# Altium PCB PCB1.PcbDoc
Units mil, origin at the board's own origin, x right, y up, seen from the top; angles counter-clockwise.
Board outline 5850 x 4725 mil, 2 copper layers (Top Layer, Bottom Layer); 96 components, 60 nets, 305 pads, 0 vias.
Unrouted connection lines stored in the file: 105.
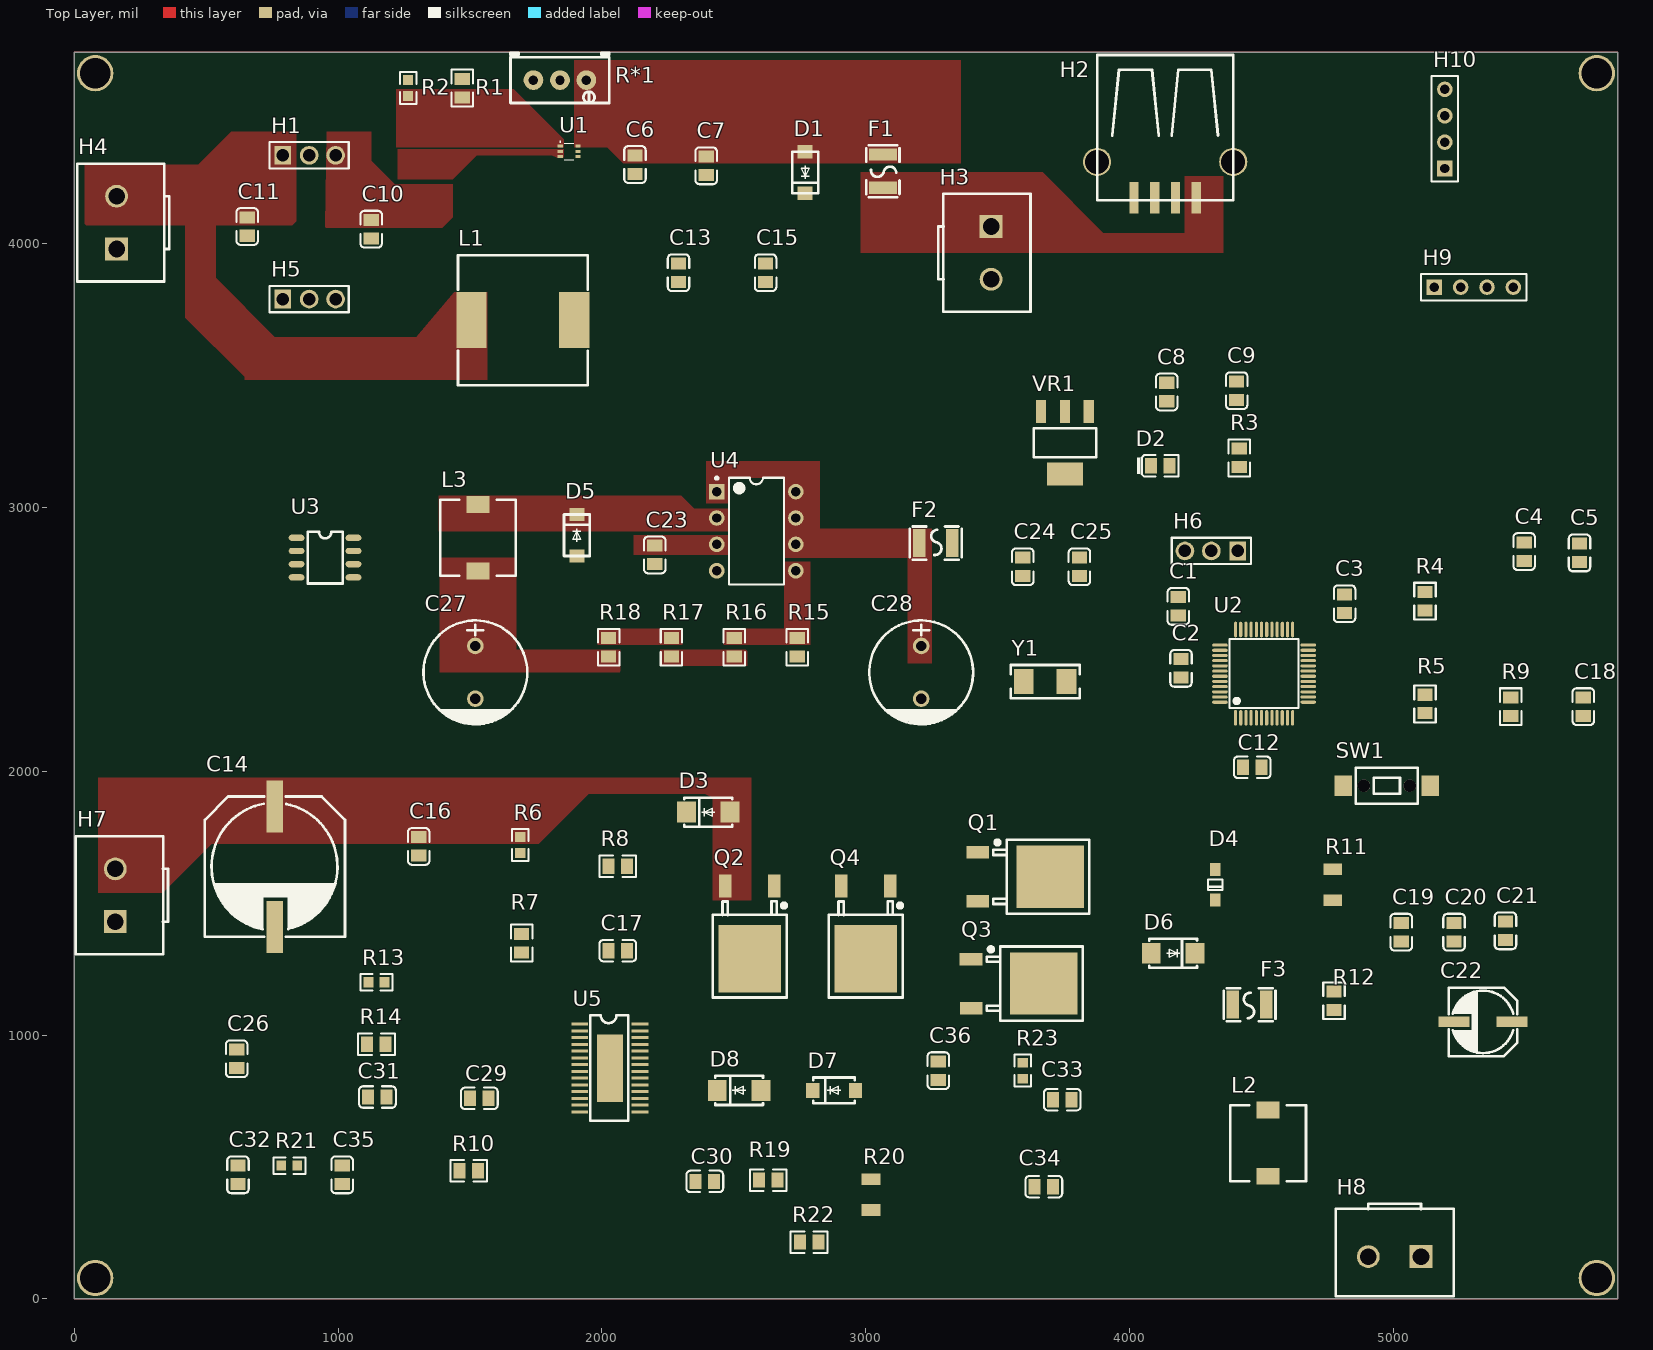
[diagram p0: Top Layer view]
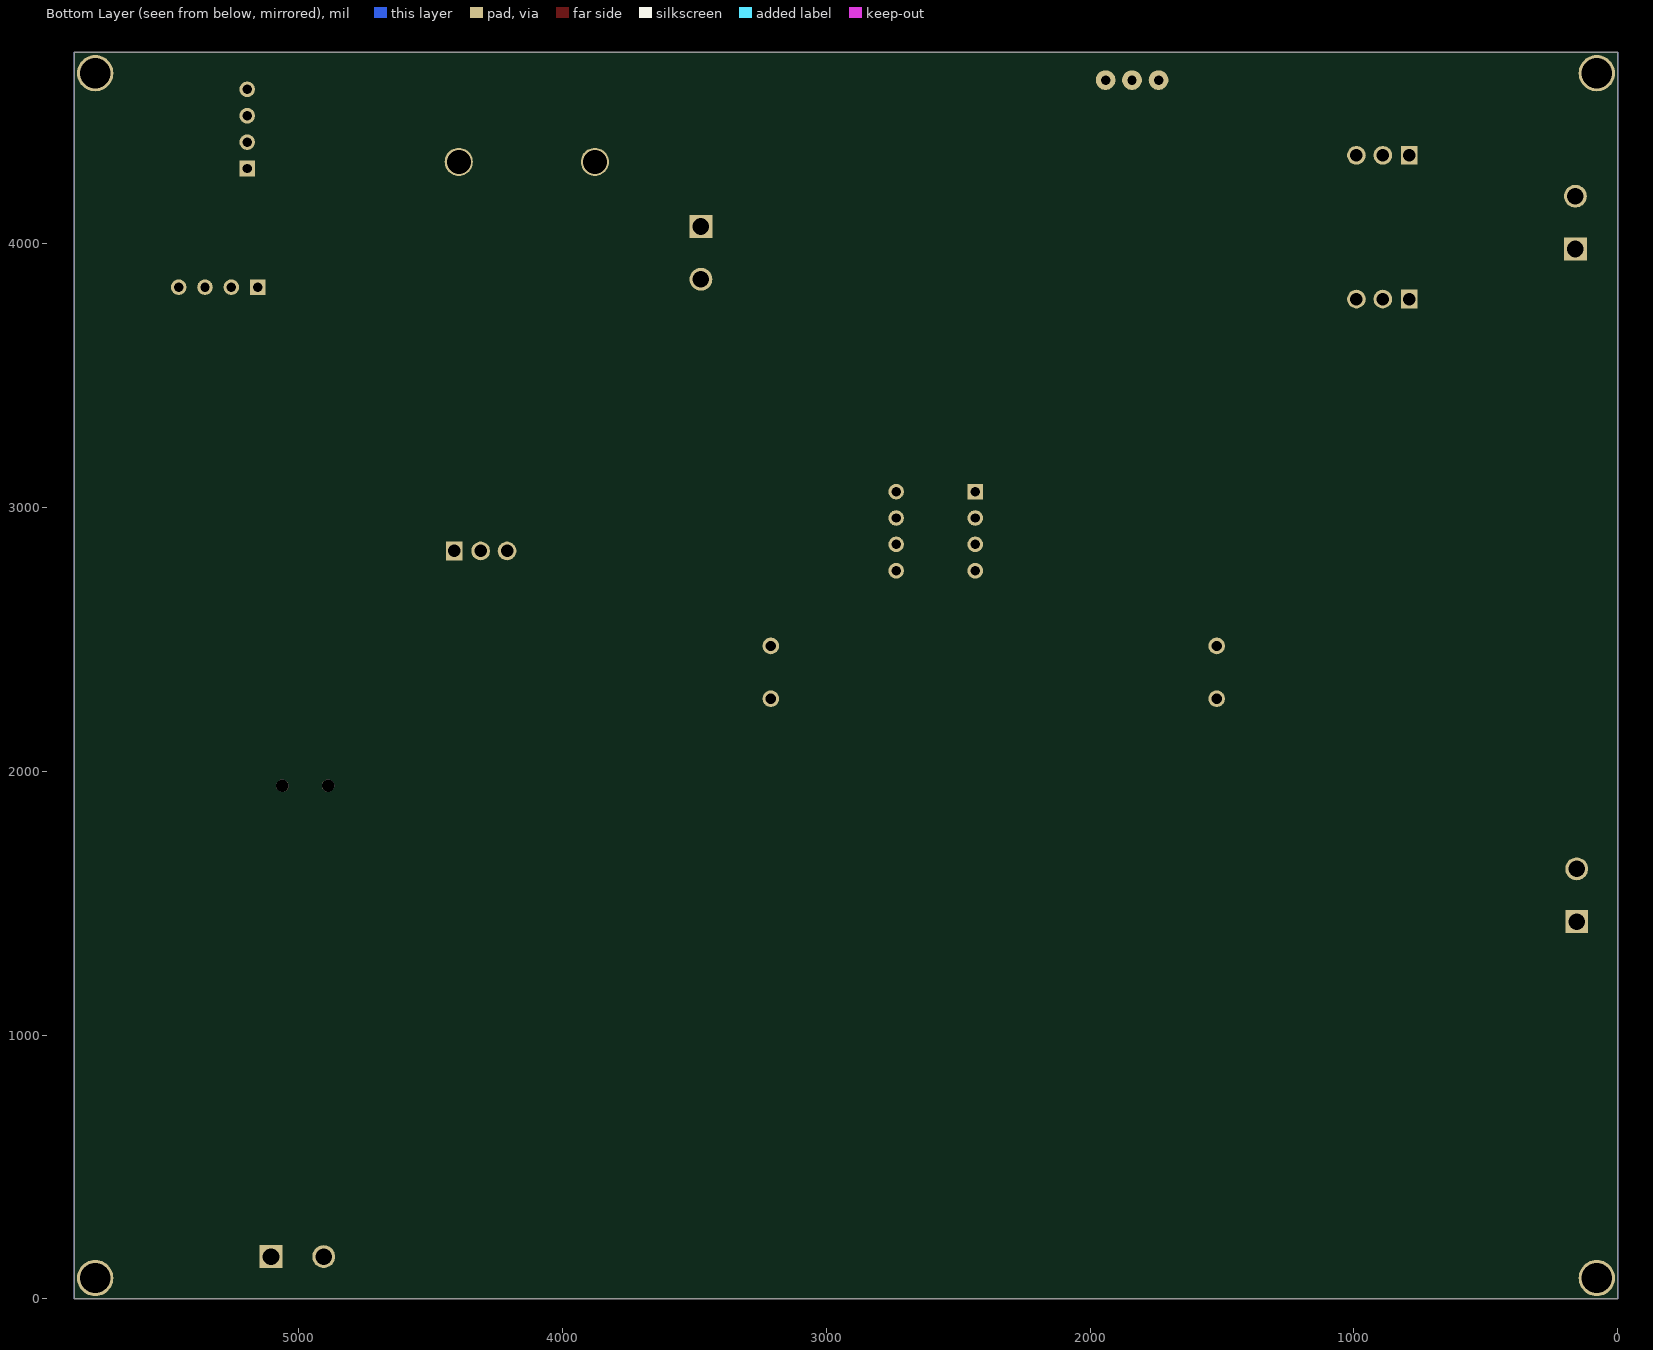
[diagram p1: Bottom Layer view, seen from below]

## Layer stack, top to bottom
Top Solder: solder mask 0.4, Solder Resist, Dk 3.5
Top Layer: signal copper 1.4
Dielectric 1: dielectric 12.6, FR-4, Dk 4.8
Bottom Layer: signal copper 1.4
Bottom Solder: solder mask 0.4, Solder Resist, Dk 3.5

## Board outline
0,0 5850,0 5850,4725 0,4725

## Design rules (kind name [scope] priority, off if disabled: settings)
Clearance [All] p1: gap=6 ignorepadtopadclearanceinfootprint=TRUE except(0: Arc-Hole Track-Hole SMDPad-Hole THPad-Hole Via-Hole Fill-Hole Poly-Hole Region-Hole Text-Hole)
HoleSize [All] p1: absolutevalues=TRUE maxlimit=393.7 minlimit=1 maxpercent=80.000 minpercent=20.000
HoleToHoleClearance [All] p1: gap=10 allowstackedmicrovias=FALSE
MinimumSolderMaskSliver [All] p1: minsoldermaskwidth=0
PolygonConnect [All] p1: connectstyle=Direct reliefconductorwidth=10 reliefentries=4 polygonreliefangle="90 Angle" airgapwidth=10
RoutingVias [All] p1: holewidth=11.81 width=19.68 viastyle="Through Hole" minholewidth=11.81 minwidth=19.68 maxholewidth=393.7 maxwidth=393.7
SilkToSilkClearance [All] p1: silktosilkclearance=0
SilkToSolderMaskClearance [IsPad] p1: minsilkscreentomaskgap=0 clearancetoexposedcopper=TRUE
SolderMaskExpansion [All] p1: expansion=4 istentingtop=FALSE
Width [All] p1: maxlimit=100 minlimit=8 preferedwidth=8 minimp=50.000000 maximp=50.000000 favimp=50.000000
25 further rules are at their usual default settings.

## Components (designator, comment, footprint, x,y, rotation, side; value= is the part's Value field where it differs from the comment)
C1 "0.1uf" 0805_C 4185,2625 r270 top
C2 "0.1uf" 0805_C 4195,2390 r90 top
C3 "0.1uf" 0805_C 4815,2635 r270 top
C4 "10uf" 0805_C 5495.75,2832.72 r90 top
C5 "100nf" 0805_C 5705.75,2827.72 r90 top
C6 "22uf" 0805_C 2125,4300 r90 top
C7 "22uf" 0805_C 2395,4295.04 r90 top
C8 "100nf" 0805_C 4140.75,3437.68 r90 top
C9 "22uf" 0805_C 4405.75,3442.72 r90 top
C10 "10uf" 0805_C 1125,4055 r270 top
C11 "10uf" 0805_C 655,4065 r270 top
C12 "0.1uf" 0805_C 4465,2015 r180 top
C13 "1nf" 0805_C 2290,3889.96 r90 top
C14 "68uF" CAP-SMD_BD12.5-L13.0-W13.0-FD 760,1638.35 r270 top
C15 "0.1uf" 0805_C 2620,3889.96 r90 top
C16 "10uF" 0805_C 1305,1715 r90 top
C17 "220nF" 0805_C 2060,1320 r180 top
C18 "0.1uF" 0805_C 5720,2245 r270 top
C19 "10uF" 0805_C 5030,1390 r90 top
C20 "10uF" 0805_C 5230,1390 r90 top
C21 "10uF" 0805_C 5425,1395 r90 top
C22 "56uF" CAP-SMD_BD6.3-L6.6-W6.6-RD 5340,1050 r0 top
C23 "300pF" 0805_C 2200,2820 r90 top
C24 "22pF" 0805_C 3595,2775.04 r270 top
C25 "22pF" 0805_C 3810,2775.04 r270 top
C26 "150pF" 0805_C 615,910 r90 top
C27 "100UF" CAP-TH_BD10.0-P5.00-D1.0-FD 1520,2375 r270 top
C28 "100UF" CAP-TH_BD10.0-P5.00-D1.0-FD 3210,2375 r270 top
C29 "1uF" 0805_C 1535,760 r0 top
C30 "47pf" 0805_C 2390,445 r0 top
C31 "22nF" 0805_C 1148.66,765 r180 top
C32 "8.2nF" 0805_C 620,470 r270 top
C33 "0.1uF" 0805_C 3745,755 r180 top
C34 "0.1uF" 0805_C 3675,425 r180 top
C35 "68pF" 0805_C 1015,470 r270 top
C36 "1uF" 0805_C 3275,865 r90 top
D1 "ss14" SMA 2770,4270 r270 top
D2 "蓝灯 0805" 0805_LED_S1 4115.71,3157.72 r0 top
D3 "BYS10-45-E3" SMA_L4.4-W2.8-LS5.4-RD 2402.68,1845 r0 top
D4 "CDBK0520" SOD-123F 4325,1570 r90 top
D5 "SS14" SMA 1905,2895 r90 top
D6 "BYS10-45-E3" SMA_L4.4-W2.8-LS5.4-RD 4165,1310 r180 top
D7 "CD214A-B240LLF" DO-214AC_L4.3-W2.7-LS5.3-FD 2880,790 r180 top
D8 "CD214A-B240LLF" SMA_L4.4-W2.8-LS5.4-RD 2520,790 r0 top
F1 "1A" F1210 3065,4275 r270 top
F2 "500mA" F1210 3265,2865 r0 top
F3 "2A" F1210 4455,1115 r180 top
H1 "1*3P 2.54mm" HDR-TH_3P-P2.54-V 890,4335 r0 top
H2 "USB" USB-A-S 4135,4310 r270 top
H3 "1*2 5.08mm" CONN-TH_2P-P5.08_31320102 3475,3965 r270 top
H4 "1*2 5.08mm" CONN-TH_2P-P5.08_31320102 160,4080 r90 top
H5 "1*3P 2.54mm" HDR-TH_3P-P2.54-V 890,3790 r0 top
H6 "USART" HDR-TH_3P-P2.54-V 4310,2835 r180 top
H7 "1*2 5.08mm" CONN-TH_2P-P5.08_31320102 155,1530 r90 top
H8 "1*2 5.08mm" CONN-TH_2P-P5.08_31320102 5005,160 r180 top
H9 "IIC" HDR1X4 5155,3835 r0 top
H10 "ST-Link" HDR1X4 5195,4285 r90 top
L1 "1uh" IND-SMD_L12.5-W12.5_SWRH1207B 1700,3710 r0 top
L2 "15uH" "7*7*4MM 10UH" 4525,590 r270 top
L3 "47uH" "7*7*4MM 10UH" 1530,2885 r90 top
Q1 "P5506BDG" TO-252-2 3424.41,1600 r180 top
Q2 "ME15N10" TO-252-2 2560,1565.59 r90 top
Q3 "P5506BDG" TO-252-2 3399.41,1195 r180 top
Q4 "ME15N10" TO-252-2 3000,1565.59 r90 top
R1 "100K" 0805_R 1470,4590 r270 top
R2 "715K" 0603_R 1265,4590 r90 top
R3 "1K" 0805_R 4415.75,3187.72 r270 top
R4 "10K" 0805_R 5120,2644.96 r90 top
R5 "470 Ohm" 0805_R 5120,2255 r90 top
R6 "40.2K" 0603_R 1690,1720.31 r90 top
R7 "4.7K" 0805_R 1695,1348.66 r90 top
R8 "10 Ohm" 0805_R 2060,1640 r0 top
R9 "1K" 0805_R 5445,2245 r90 top
R10 "20mOhm" 0805_R 1495,485 r0 top
R11 "357k" 1206 4770,1570 r90 top
R12 "20K" 0805_R 4775,1130 r90 top
R13 "93.1K" 0603_R 1145,1200 r0 top
R14 "115K" 0805_R 1145,965 r0 top
R15 "1K" 0805_R 2740,2470 r90 top
R16 "1K" 0805_R 2501.67,2470 r270 top
R17 "1K" 0805_R 2263.33,2470 r90 top
R18 "1K" 0805_R 2025,2470 r270 top
R19 "100Ohm" 0805_R 2630,450 r0 top
R20 "25mOhm" 1206 3020,395 r90 top
R21 "20K" 0603_R 815,505 r0 top
R22 "100Ohm" 0805_R 2785,215 r0 top
R23 "20K" 0603_R 3595,865 r270 top
R*1 "50K" RES-ADJ-TH_3P-L9.5-W4.9-P2.50-L_3296W 1840.39,4620 r180 top
SW1 "RST" SW-SMD_L3.5-W6.0-P8.00 4975,1945 r180 top
U1 "TPS61023" SOT-563_L1.6-W1.2-P0.50-LS1.6-BL 1875,4350 r270 top
U2 "STM32F103C8T6" LQFP-48_L7.0-W7.0-P0.50-LS9.0-BL 4510,2370 r0 top
U3 "ACS712ELCTR-05B-T" SOIC-8_L5.0-W4.0-P1.27-LS6.0-BL 950,2810 r270 top
U4 "MC34063N" DIP-8_L9.8-W6.6-P2.54-LS7.6-BL 2585,2910 r270 top
U5 "LM5175PWPT" HTSSOP-28_L9.8-W4.5-P0.65-LS6.6-BL-EP 2030,875 r270 top
VR1 "AMS1117-3.3" SOT-223 3755,3245 r90 top
Y1 "8MHz" SMD-5032_2P 3680,2340 r0 top

## Footprints (in the part's own frame and the unit in brackets; to place one, negate y for a bottom-side part, rotate by r counter-clockwise, add the part's x,y. Pads: shape width x height; smd on the part's side, far side on the other; paste and mask are expansions set on the pad)
"7*7*4MM 10UH" [mm]
  rect 1.6x2.2 smd: 1(-3.2,0) 2(3.2,0)
  silkscreen extent -3.65,-3.65 3.65,3.65
0603_R [mm]
  rect 0.93x0.98 smd: 1(-0.77,0) 2(0.77,0)
  silkscreen extent -1.53,-0.79 1.54,0.79, body extent -0.85,-0.4 0.85,0.4, height 0.56
0805_C [mm]
  rect 1.16x1.47 smd: 1(-0.89,0) 2(0.89,0)
  silkscreen extent -1.77,-1.04 1.77,1.04, body extent -1,-0.62 1,0.63, height 0.77
0805_LED_S1 [mm]
  rect 1.16x1.47 smd: A(0.89,0) K(-0.89,0)
  silkscreen extent -2.24,-1.04 1.77,1.03, body extent -1.01,-0.62 1.01,0.62, height 1.1
0805_R [mm]
  rect 1.16x1.47 smd: 1(-0.89,0) 2(0.89,0)
  silkscreen extent -1.77,-1.04 1.77,1.03, body extent -1,-0.62 1,0.63, height 0.49
1206 [mm]
  rect 1.13x1.8 smd: 1(-1.49,0) 2(1.49,0)
CAP-SMD_BD6.3-L6.6-W6.6-RD [mm]
  rect 3x1 smd: 1(2.8,0) 2(-2.8,0)
  silkscreen extent -3.3,-3.3 3.3,3.3
CAP-SMD_BD12.5-L13.0-W13.0-FD [mm]
  rect 5x1.6 smd: 1(-5.8,0) 2(5.8,0)
  silkscreen extent -6.75,-6.75 6.75,6.75
CAP-TH_BD10.0-P5.00-D1.0-FD [mm]
  round 1.6 hole 1: 1(-2.54,0) 2(2.54,0)
  silkscreen extent -5,-4.99 5.08,5
CONN-TH_2P-P5.08_31320102 [mm]
  rect 2.2x2.2 hole 1.6: 1(-2.54,0)
  round 2.2 hole 1.6: 2(2.54,0)
  silkscreen extent -5.68,-5.08 5.68,3.8
DIP-8_L9.8-W6.6-P2.54-LS7.6-BL [mm]
  rect 1.5x1.5 hole 0.9: 1(-3.81,-3.81)
  round 1.5 hole 0.9: 2(-1.27,-3.81) 3(1.27,-3.81) 4(3.81,-3.81) 5(3.81,3.81) 6(1.27,3.81) 7(-1.27,3.81) 8(-3.81,3.81)
  silkscreen extent -5.23,-3.93 5.15,2.65
DO-214AC_L4.3-W2.7-LS5.3-FD [mil]
  rect 50x57.9 smd: 1(-81,0) 2(81,0)
  silkscreen extent -78,-49 79,49
F1210 [mm]
  rect 1.2x2.7 smd: 1(-1.6,0) 2(1.6,0)
  silkscreen extent -2.5,-1.6 2.5,1.6
HDR1X4 [mm] "Connector; Header; 4 Position"
  rect 1.5x1.5 hole 0.9: 1(0,0)
  round 1.5 hole 0.9: 2(2.54,0) 3(5.08,0) 4(7.62,0)
  silkscreen extent -1.27,-1.27 8.89,1.27
HDR-TH_3P-P2.54-V [mm]
  rect 1.575x1.8 hole 1.2: 1(-2.54,0)
  round 1.8 hole 1.2: 2(0,0) 3(2.54,0)
  silkscreen extent -3.81,-1.27 3.81,1.27
HTSSOP-28_L9.8-W4.5-P0.65-LS6.6-BL-EP [mm]
  rect 0.3x1.6 smd: 1(-4.225,-2.9) 2(-3.575,-2.9) 3(-2.925,-2.9) 4(-2.275,-2.9) 5(-1.625,-2.9) 6(-0.975,-2.9) 7(-0.325,-2.9) 8(0.325,-2.9) 9(0.975,-2.9) 10(1.625,-2.9) 11(2.275,-2.9) 12(2.925,-2.9) 13(3.575,-2.9) 14(4.225,-2.9) 15(4.225,2.9) 16(3.575,2.9) 17(2.925,2.9) 18(2.275,2.9) 19(1.625,2.9) 20(0.975,2.9) 21(0.325,2.9) 22(-0.325,2.9) 23(-0.975,2.9) 24(-1.625,2.9) 25(-2.275,2.9) 26(-2.925,2.9) 27(-3.575,2.9) 28(-4.225,2.9)
  rect 6.5x2.5 smd: 29(0,0)
  silkscreen extent -5.08,-1.91 5.08,1.78
IND-SMD_L12.5-W12.5_SWRH1207B [mm]
  rect 2.9x5.4 smd: 1(-4.95,0) 2(4.95,0)
  silkscreen extent -6.25,-6.25 6.25,6.25
LQFP-48_L7.0-W7.0-P0.50-LS9.0-BL [mm]
  oval 0.3x1.5 smd: 1(-2.75,-4.25) 2(-2.25,-4.25) 3(-1.75,-4.25) 4(-1.25,-4.25) 5(-0.75,-4.25) 6(-0.25,-4.25) 7(0.25,-4.25) 8(0.75,-4.25) 9(1.25,-4.25) 10(1.75,-4.25) 11(2.25,-4.25) 12(2.75,-4.25) 25(2.75,4.25) 26(2.25,4.25) 27(1.75,4.25) 28(1.25,4.25) 29(0.75,4.25) 30(0.25,4.25) 31(-0.25,4.25) 32(-0.75,4.25) 33(-1.25,4.25) 34(-1.75,4.25) 35(-2.25,4.25) 36(-2.75,4.25)
  oval 1.5x0.3 smd: 13(4.25,-2.75) 14(4.25,-2.25) 15(4.25,-1.75) 16(4.25,-1.25) 17(4.25,-0.75) 18(4.25,-0.25) 19(4.25,0.25) 20(4.25,0.75) 21(4.25,1.25) 22(4.25,1.75) 23(4.25,2.25) 24(4.25,2.75) 37(-4.25,2.75) 38(-4.25,2.25) 39(-4.25,1.75) 40(-4.25,1.25) 41(-4.25,0.75) 42(-4.25,0.25) 43(-4.25,-0.25) 44(-4.25,-0.75) 45(-4.25,-1.25) 46(-4.25,-1.75) 47(-4.25,-2.25) 48(-4.25,-2.75)
  silkscreen extent -3.33,-3.31 3.3,3.34
RES-ADJ-TH_3P-L9.5-W4.9-P2.50-L_3296W [mm]
  round 1.9 hole 0.9: 1(-2.55,0) 2(-0.01,0) 3(2.55,0)
  silkscreen extent -4.75,-2.64 4.75,2.2
SMA [mil]
  rect 50x57.9 smd: 1(-78.65,0) 2(78.65,0)
  silkscreen extent -79,-49 78,49
SMA_L4.4-W2.8-LS5.4-RD [mm]
  rect 1.8x2 smd: 1(-2.1,0) 2(2.1,0)
  silkscreen extent -2.3,-1.4 2.3,1.4
SMD-5032_2P [mm]
  rect 1.9x2.4 smd: 1(-2.05,0) 2(2.05,0)
  silkscreen extent -3.32,-1.6 3.32,1.6
SOD-123F [mm]
  rect 1.25x1 smd: 1(1.475,0) 2(-1.475,0)
  silkscreen extent -0.5,-0.7 0.5,0.7, body extent -1.9,-0.85 1.85,0.85, height 1.2
SOIC-8_L5.0-W4.0-P1.27-LS6.0-BL [mm]
  oval 0.6x1.518 smd: 1(-1.905,-2.74) 2(-0.635,-2.74) 3(0.635,-2.74) 4(1.905,-2.74) 5(1.905,2.74) 6(0.635,2.74) 7(-0.635,2.74) 8(-1.905,2.74)
  silkscreen extent -2.49,-1.67 2.5,1.7
SOT-223 [mm]
  rect 2.2x1 smd: 1(3,-2.3) 2(3,0) 3(3,2.3)
  rect 2.2x3.5 smd: 2(-3,0)
  silkscreen extent -1.4,-3 1.4,3, body extent -3.49,-3.24 3.49,3.24, height 1.64
SOT-563_L1.6-W1.2-P0.50-LS1.6-BL [mm]
  rect 0.3x0.5 smd: 1(-0.508,-0.85) 2(0,-0.85) 3(0.508,-0.85) 4(0.508,0.85) 5(0,0.85) 6(-0.508,0.85)
  silkscreen extent -0.99,-0.9 0.79,0.48
SW-SMD_L3.5-W6.0-P8.00 [mm]
  rect 1.7x2 smd: A(-4.2,0) B(4.2,0)
  round 1.2 hole 1.2 unplated: ""(-2.2,0) ""(2.2,0)
  silkscreen extent -3,-1.75 3,1.75
TO-252-2 [mm]
  rect 2.2x1.2 smd: 1(0,-2.361) 3(-0.004,2.361)
  rect 6.5x6 smd: 2(-7,0)
  silkscreen extent -10.75,-3.57 -1.5,3.57, body extent -9.74,-3.27 0.2,3.27, height 2.44
USB-A-S [mil]
  rect 118.1x35.4 smd: D+(136,-39) D-(136,39) GND(136,-118) VBUS(136,118)
  round 106.7 hole 91: P$5(0,-258) P$6(0,258)
  silkscreen extent -405,-258 146,258

## Part data
C1 C2 C3 C6 C7 C10 C11 C12 C16 C17 C19 C20 C21 C26 C29 C30 C31 C32 C33 C34 C35 C36: library part C_非极性电容, "贴片电容", Package=0805, SuppliersPartNumber=C8031, ComponentLink1Description=供应商链接, ComponentLink1URL=http://www.szlcsc.com/product/details_8509.html, Supplier=LC
C4 C9: library part "1206 470pF (471) 10% 50V", "贴片电容", Package=1206, SuppliersPartNumber=C1868, ComponentLink1Description=供应商链接, ComponentLink1URL=http://www.szlcsc.com/product/details_2220.html, Supplier=LC
C5 C8: library part "0805 2.7pF (2R7) 0.25pF 50V", "贴片电容", Package=0805, SuppliersPartNumber=C1803, ComponentLink1Description=供应商链接, ComponentLink1URL=http://www.szlcsc.com/product/details_2155.html, Supplier=LC
C13 C15 C23: library part C_贴片, "贴片电容", Package=0805, SuppliersPartNumber=C8031, ComponentLink1Description=供应商链接, ComponentLink1URL=http://www.szlcsc.com/product/details_8509.html, Supplier=LC
C14 C22: library part C_极性电容, BOM_Manufacturer=Lelon, BOM_Manufacturer Part=VE-331M1E0810-TRO, BOM_Supplier=LCSC, BOM_Supplier Part=C249523, Contributor=LCSC, nameAlias=Capacitance, spicePre=C, spiceSymbolName=VE-331M1E0810-TRO
C18: library part "0805 27pF (270) 5% 50V", "贴片电容", Package=0805, SuppliersPartNumber=C8031, ComponentLink1Description=供应商链接, ComponentLink1URL=http://www.szlcsc.com/product/details_8509.html, Supplier=LC
C24 C25: library part "0805 22pF (220) 5% 50V", "贴片电容", Package=0805, SuppliersPartNumber=C1804, ComponentLink1Description=供应商链接, ComponentLink1URL=http://www.szlcsc.com/product/details_2156.html, Supplier=LC
C27 C28: library part C_SDM贴片电解, BOM_Manufacturer=Lelon, BOM_Manufacturer Part=VE-331M1E0810-TRO, BOM_Supplier=LCSC, BOM_Supplier Part=C249523, Contributor=LCSC, nameAlias=Capacitance, spicePre=C, spiceSymbolName=VE-331M1E0810-TRO
D1: library part SS14, BOM_Manufacturer=长电, BOM_pre=TXP.033, BOM_Supplier=LCSC, BOM_Supplier Part=undefined, Contributor=LZCG, spicePre=D, spiceSymbolName=SS14
D2: library part "0805 蓝灯", "发光二极管", Package=0805, SuppliersPartNumber=C2293, ComponentLink1Description=供应商链接, ComponentLink1URL=http://www.szlcsc.com/product/details_2666.html, Supplier=LC
D3 D4 D6 D7 D8: library part 稳压二极管, BOM_Manufacturer=DIODES, BOM_Manufacturer Part=DFLZ10-7, BOM_Supplier=LCSC, BOM_Supplier Part=C151371, Contributor=LCSC, spicePre=D, spiceSymbolName=DFLZ10-7
D5: BOM_Manufacturer=长电, BOM_pre=TXP.033, BOM_Supplier=LCSC, BOM_Supplier Part=undefined, Contributor=LZCG, spicePre=D, spiceSymbolName=SS14
F1 F2 F3: library part 1210保险丝, BOM_Manufacturer="Fuzetec Tech", BOM_Manufacturer Part=FSMD020-1210-R, BOM_Supplier=LCSC, BOM_Supplier Part=C224190, Contributor=LCSC, spicePre=F, spiceSymbolName=FSMD020-1210-R
H1 H5 H6: library part "1*3 2.54mm", BOM_Manufacturer=Ckmtw, BOM_Manufacturer Part="210S-1*3P L=11.6MMGold-plated black", BOM_Supplier=LCSC, BOM_Supplier Part=C124376, Contributor=LCSC, spicePre=H, spiceSymbolName="210S-1*3P L=11.6MMGold-plated black"
H2: library part USB-A, Contributor=SparkFun, sourceId=HhbsKEWew, spicePre=J, spiceSymbolName=USB, timeStamp=1472634994
H3 H4 H7 H8: BOM_Manufacturer="METZ CONNECT", BOM_Manufacturer Part=31320102, BOM_Supplier=LCSC, BOM_Supplier Part=C123228, Contributor=LCSC, spicePre=C, spiceSymbolName=31320102
H9 H10: library part "1*4 2.54mm", LatestRevisionDate=17-Jul-2002, LatestRevisionNote="Re-released for DXP Platform.", Publisher="Altium Limited"
L1 L3: library part L功率贴片电感7*7*4, BOM_Manufacturer=TDK, BOM_Manufacturer Part=SLF7045T-331MR25-PF, BOM_Supplier=LCSC, BOM_Supplier Part=C136202, nameAlias=Inductance, spicePre=L, spiceSymbolName="CDRH74R 7*7*4MM 贴片电感"
L2: library part L功率贴片电感, BOM_Manufacturer=TDK, BOM_Manufacturer Part=SLF7045T-331MR25-PF, BOM_Supplier=LCSC, BOM_Supplier Part=C136202, nameAlias=Inductance, spicePre=L, spiceSymbolName="CDRH74R 7*7*4MM 贴片电感"
Q1 Q2 Q3 Q4: library part "AO3400A N道沟 X0YV1T SOT-23", "MOS(场效应管)", Package=SOT-23, SuppliersPartNumber=C20917, ComponentLink1Description=供应商链接, ComponentLink1URL=http://www.szlcsc.com/product/details_21629.html, Supplier=LC
R1 R2 R4 R5 R6 R7 R8 R10 R11 R12 R13 R14 R15 R16 R17 R18 R19 R20 R21 R22 R23: library part R, "贴片电阻", Package=0805, SuppliersPartNumber=C17514, ComponentLink1Description=供应商链接, ComponentLink1URL=http://www.szlcsc.com/product/details_18202.html, Supplier=LC
R3: library part "0805 R", "贴片电阻", Package=0805, SuppliersPartNumber=C17514, ComponentLink1Description=供应商链接, ComponentLink1URL=http://www.szlcsc.com/product/details_18202.html, Supplier=LC
R9: library part "0805 1.2KΩ (1201) 1%", "贴片电阻", Package=0805, SuppliersPartNumber=C17379, ComponentLink1Description=供应商链接, ComponentLink1URL=http://www.szlcsc.com/product/details_18067.html, Supplier=LC
R*1: library part R_可调, BOM_Manufacturer="Chengdu Guosheng Tech", BOM_Manufacturer Part=3296W-1-100, Resistance(Ohms)=10, BOM_Supplier=LCSC, BOM_Supplier Part=C118900, Contributor=LCSC, nameAlias="Resistance (Ohms)", spicePre=R, spiceSymbolName=3296W-1-100
SW1: library part 贴片微动开关, "贴片微动开关", BOM_Manufacturer=HYP, BOM_Manufacturer Part=1TS002C-1800-4300, BOM_Supplier=LCSC, BOM_Supplier Part=C255795, Contributor=LCSC, spicePre=S, spiceSymbolName=1TS002C-1800-4300
U1: BOM_Manufacturer=TI, BOM_Manufacturer Part=TPS61023DRLR, Contributor=kerrea, link=http://www.ti.com/product/TPS61023, spicePre=U, spiceSymbolName=TPS61023
U2: "ARM Cortex-M3 32-bit MCU, 64 KB Flash, 20 KB Internal RAM, 37 I/Os, 48-pin LQFP, -40 to 85 degC, Tray", I/Os (High Current)=37, Operating Frequency(F) (Processor speed) (MHz)=72, Supplier Part Number 1=497-6063-ND, Supply Voltage(Vcc) min (V)=2, A/D Converter="2x12-bit (10 Channel)", ComponentLink1Description="Manufacturer URL", ComponentLink1URL=http://www.st.com/web/en/home.html, ComponentLink2Description=Datasheet, ComponentLink2URL=http://www.st.com/st-web-ui/static/active/en/resource/technical/document/datasheet/CD00161566.pdf, ComponentLink3Description="Package Specification", ComponentLink3URL=http://www.st.com/st-web-ui/static/active/en/resource/technical/document/datasheet/DM00058181.pdf, Core="ARM Cortex-M3", DatasheetVersion="Rev. 16", FLASH Size (Prog) (kB)=64, Internal RAM Size (kB)=20, Mounting Technology="Surface Mount", PackageDescription="48-Pin Low Profile Quad Flat Package, 7 x 7 mm Body, 0.5 mm Pitch", PackageReference=LQFP48, PackageVersion="Rev. 6, 06/2013", Packing=Tray, PartNumber=STM32F103C8T6, Supplier 1=Digi-Key, Supplier 2=Farnell, Supplier 3=Newark, Supplier 4=Newark, Supplier 5=Mouser, Supplier Part Number 2=1447637, Supplier Part Number 3=59M2182, Supplier Part Number 4=57P1222, Supplier Part Number 5=511-STM32F103C8T6
U3: BOM_LCSC Assembly=Yes, BOM_Manufacturer=ALLEGRO, BOM_Manufacturer Part=ACS712ELCTR-05B-T, BOM_Supplier=LCSC, BOM_Supplier Part=C44471, image=//image.lceda.cn/szlcsc/C44471.jpg, SMT Type=Extend, spicePre=X, spiceSymbolName=ACS712ELCTR-05B-T
U4: BOM_Manufacturer=HGSEMI, BOM_Manufacturer Part=MC34063N, BOM_Supplier=LCSC, BOM_Supplier Part=C444399, Contributor=LCSC, spicePre=U, spiceSymbolName=MC34063N
U5: BOM_LCSC Assembly=Yes, BOM_Manufacturer="Texas Instruments", BOM_Manufacturer Part=LM5175PWPT, BOM_Supplier=LCSC, BOM_Supplier Part=C181517, Contributor=LCSC, SMT Type=Extend, spicePre=U, spiceSymbolName=LM5175PWPT
VR1: library part "SOT-223 AMS1117-3.3", "低压差线性稳压(LDO)", Package=SOT-223, SuppliersPartNumber=C6186, ComponentLink1Description=供应商链接, ComponentLink1URL=http://www.szlcsc.com/product/details_6652.html, Supplier=LC
Y1: library part "SMD-5032_2P 8MHz 20ppm 20pF", "贴片晶振", Package=SMD-5032_2P, SuppliersPartNumber=C115962, ComponentLink1Description=供应商链接, ComponentLink1URL=http://www.szlcsc.com/product/details_117214.html, Supplier=LC

## Free pads (board coordinates)
  round 137.8 hole 114.17: ""(78.74,78.74) ""(78.74,4646.26) ""(5771.26,4646.26) ""(5771.26,78.74)

## Nets (pads, with @x,y where several pads share a name; then routed paths per layer and width w, separated by ;. In a path a pad name is that pad's centre, name@x,y a point inside that pad or via, vN(x,y) a via of type N, cw(c..) or ccw(c..) an arc to the next point about the centre after c; other vN are vias at no path point)
BOOT1: C33.2 D7.1 U5.26
BOOT2: C34.2 D8.1 U5.20
COMP: C35.1 R21.2 U5.9
CURRENT: U2.14 U3.7
FB: R11.1 R12.2 U5.11
GND: C1.1 C2.1 C3.1 C4.1 C5.1 C6.1 C7.1 C8.1 C9.1 C11.2 C12.1 C13.2 C14.2 C15.1 C16.1 C17.1 C18.1 C19.1 C20.1 C21.1 C22.2 C23.1 C24.1 C25.1 C26.1 C27.2 C28.2 C29.1 C31.2 C32.2 C35.2 C36.1 D2.K D5.1 H2.GND H3.2 H4.1 H5.1 H6.3 H7.1 H8.2 H9.1 H10.1 R1.1 R5.1 R7.1 R12.1 R13.1 R14.1 R15.1 R20.1 R22.2 SW1.A U1.4 U2.8 U2.23 U2.35 U2.44 U2.47 U3.5 U4.4 U5.5 U5.10 U5.22 VR1.1
HDRV2: Q1.1 U5.19
ISNS+: D4.1 Q1.2 R10.1 U5.14
ISNS-: C19.2 C20.2 C21.2 C22.1 F3.2 R10.2 R11.2 U5.13
LDRV2: Q3.1 U5.21
NetC6_2: C6.2 C7.2 D1.1 F1.1 R*1.1 U1.6
NetC10_1: C10.1 C14.1 C16.2 D3.2 H1.3 H7.2 R6.2 U3.3 U3.4
NetC10_2: C10.2 H5.2
NetC12_2: C12.2 U2.1
NetC13_1: C13.1 U3.6
NetC18_2: C18.2 R9.1 SW1.B U2.7
NetC23_2: C23.2 U4.3
NetC26_2: C26.2 U5.7
NetC28_1: C28.1 F2.1 U4.1 U4.6 U4.7 U4.8
NetC30_1: C30.1 R22.1 U5.15
NetC30_2: C30.2 R19.1 U5.16
NetC32_1: C32.1 R21.1
NetD2_A: D2.A R3.2
NetD3_1: D3.1 R8.2
NetD5_2: D5.2 L3.2 U4.2
NetD6_2: D6.2 Q3.3 Q4.2 R19.2 R20.2
NetF1_2: F1.2 H2.VBUS H3.1
NetH1_2: H1.2 H5.3
NetH6_1: H6.1 U2.21
NetH6_2: H6.2 U2.22
NetL1_2: L1.2 U1.5
NetQ2_1: Q2.1 U5.27
NetQ2_3: Q2.3 U1.2 U1.3 U3.1 U3.2
NetQ4_1: Q4.1 U5.25
NetR1_2: R1.2 R2.1 U1.1
NetR2_2: R2.2 R*1.2 R*1.3
NetR4_1: R4.1 R5.2 U2.16
NetR6_1: R6.1 R7.2 U5.1
NetR13_2: R13.2 U5.4
NetR14_2: R14.2 U5.6
NetR15_2: R15.2 R16.1 U4.5
NetR16_2: R16.2 R17.1
NetR17_2: R17.2 R18.1
PGOOD: R23.2 U5.17
SCL: H9.3 U2.11
SDA: H9.4 U2.12
SS: C31.1 U5.8
SW1: C33.1 D6.1 L2.1 Q2.2 Q4.3 U5.28
SW2: C34.1 D4.2 L2.2 Q1.3 Q3.2 U5.18
SWCLK: H10.3 U2.37
SWDIO: H10.4 U2.34
VCC: C36.2 D7.2 D8.2 R23.1 U5.23
"VCC 3.3V": C1.2 C2.2 C3.2 C8.2 C9.2 H9.2 H10.2 R3.1 R9.2 U2.9 U2.24 U2.36 U2.48 VR1.2
"VCC 5.0V": C4.2 C5.2 C15.2 C27.1 D1.2 L3.1 R18.2 U3.8 VR1.3
VIN: C17.2 R8.1 U5.2
VISNS: F2.2 R4.2 U5.3
VOLTAGE: C11.1 H1.1 H4.2 L1.1 U2.15
Vout: C29.2 F3.1 H8.1 U5.12 U5.24
XCLK0: C24.2 U2.5 Y1.1
XCLK1: C25.2 U2.6 Y1.2
pads on no net: H2.D+ H2.D- H2.P$5 H2.P$6 SW1. U2.2 U2.3 U2.4 U2.10 U2.13 U2.17 U2.18 U2.19 U2.20 U2.25 U2.26 U2.27 U2.28 U2.29 U2.30 U2.31 U2.32 U2.33 U2.38 U2.39 U2.40 U2.41 U2.42 U2.43 U2.45 U2.46 U5.29

## Polygon pours and split planes (outlines as drawn)
NetC6_2 on Top Layer "NETC6_2_L01_P005" (solid, pour order 5): 1895,4695 1895,4365 2020,4365 2080,4305 3360,4305 3360,4695 3335,4695
NetQ2_3 on Top Layer "NETQ2_3_L01_P002" (solid, pour order 2): 1225,4245 1435,4245 1525,4335 1810,4335 1830,4325 1855,4325 1855,4360 1225,4360
NetR1_2 on Top Layer "NETR1_2_L01_P000" (solid, pour order 0): 1220,4585 1665,4585 1855,4395 1855,4365 1220,4365
"VCC 5.0V" on Top Layer (solid, pour order 31): 2070,2375 2069.11,2460.16 2068.95,2460 1675,2460 1675,2810 1385,2810 1385,2375
NetR17_2 on Top Layer "NETR17_2_L01_P029" (solid, pour order 29): 1984.25,2539.68 2304.08,2539.68 2304.08,2480 1984.25,2480
NetR16_2 on Top Layer "NETR16_2_L01_P028" (solid, pour order 28): 2220,2460 2545,2460 2550,2455 2550,2400 2222.9,2400 2220,2402.9
NetR15_2 on Top Layer (solid, pour order 27): 2460.92,2480 2790,2480 2790,2795 2690,2795 2690,2539.68 2460.92,2539.68
NetC23_2 on Top Layer "NETC23_2_L01_P024" (solid, pour order 24): 2480,2895 2120,2895 2120,2820 2480,2820
NetD5_2 on Top Layer "NETD5_2_L01_P022" (solid, pour order 22): 2480,2995 2480.67,2994.33 2480.67,2910 1385,2910 1381.3,2910 1381.3,2916.3 1381.3,3043.7 2301.3,3043.7 2350,2995
NetC28_1 on Top Layer (solid, pour order 21): 2395,3015 2480,3015 2480,3112.09 2480.67,3112.76 2689.33,3112.76 2689.33,2810 3160,2810 3160,2410 3250,2410 3250,2920 2825,2920 2825,3175 2395,3175
GND on Top Layer "NONET_L01_P018" (solid, shelved, pour order 18): 0,4725 0,0 5850,0 5850,4725
VISNS on Top Layer "VISNS_L01_P017" (solid, pour order 17): 2565,1975 2565,1510 2550,1510 2535,1510 2420,1510 2420,1895 2420,1900 2390,1915 1950,1915 1760,1725 520,1725 335,1540 90,1540 90,1975
VOLTAGE on Top Layer "VOLTAGE_L01_P008" (solid, pour order 8): 535,4115 535,3870 760,3645 1295,3645 1440,3815 1565,3815 1565,3540 1565,3485 1560,3485 645,3485 645,3495 420,3720 420,3920 420,4115
VOLTAGE on Top Layer "VOLTAGE_L01_P007" (solid, pour order 7): 595,4425 840,4425 840,4085 825,4070 45,4070 40,4075 40,4300 470,4300
NetF1_2 on Top Layer "NETF1_2_L01_P006" (solid, pour order 6): 2980,4270 3670,4270 3900,4040 4210,4040 4210,4255 4355,4255 4355,4035 4355,3965 4195,3965 2980,3965
ISNS- on Top Layer "ISNS-_L01_P003" (solid, pour order 3): 955.79,4425 950,4060 980,4060 1395,4060 1435,4100 1435,4225 1215,4225 1125,4315 1125,4425
GND on Bottom Layer "NONET_L02_P010" (solid, shelved, pour order 10): 0,4725 0,0 5850,0 5850,4725

## Silkscreen, mask and mechanical layers (free items; w line width, h text height)
Mechanical 13:
  lines w10: 0,0 5850,0 5850,4725 0,4725

## Dimensions
0,4725 to 0,0 on Mechanical 13
0,0 to 5850,0 on Mechanical 13